# Altium PCB driver_V1.1.PcbDoc (part 1 of 2)
Units mm, origin at the board's own origin, x right, y up, seen from the top; angles counter-clockwise.
Board outline 200 x 65 mm, 2 copper layers (Top Layer, Bottom Layer), stack 1.58 mm thick; 210 components, 21 nets, 550 pads, 102 vias.
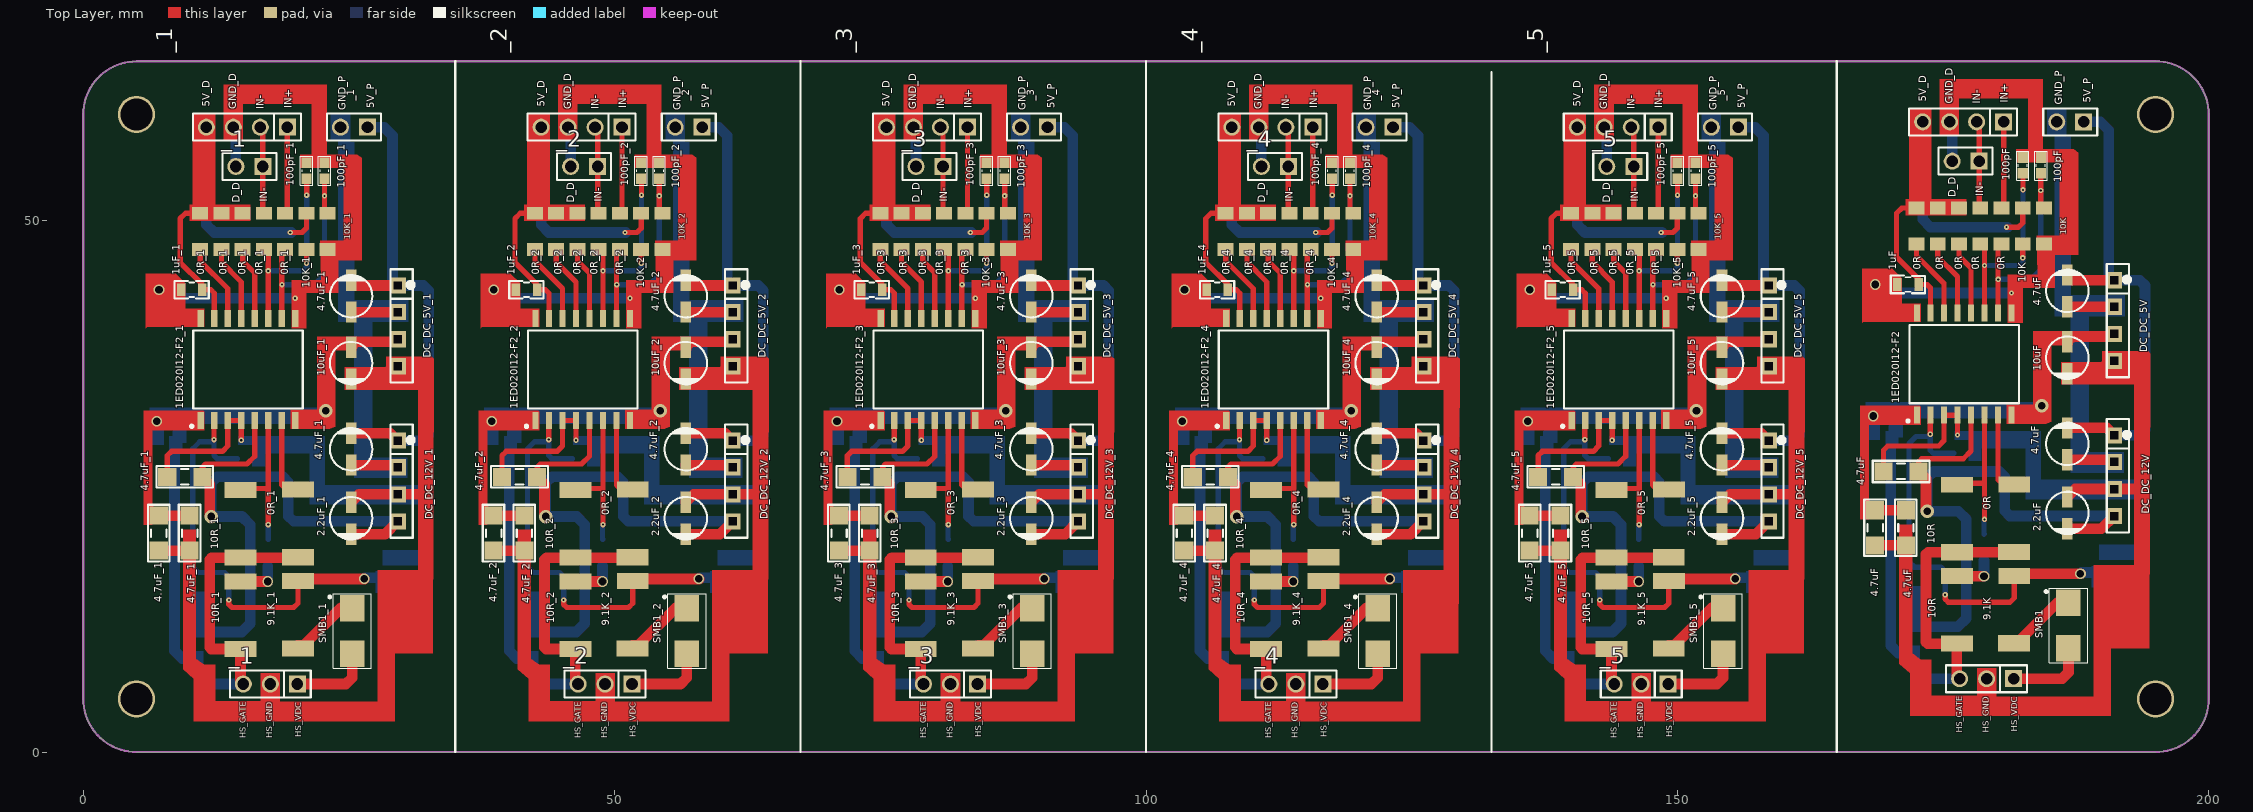
[diagram p0: Top Layer view]
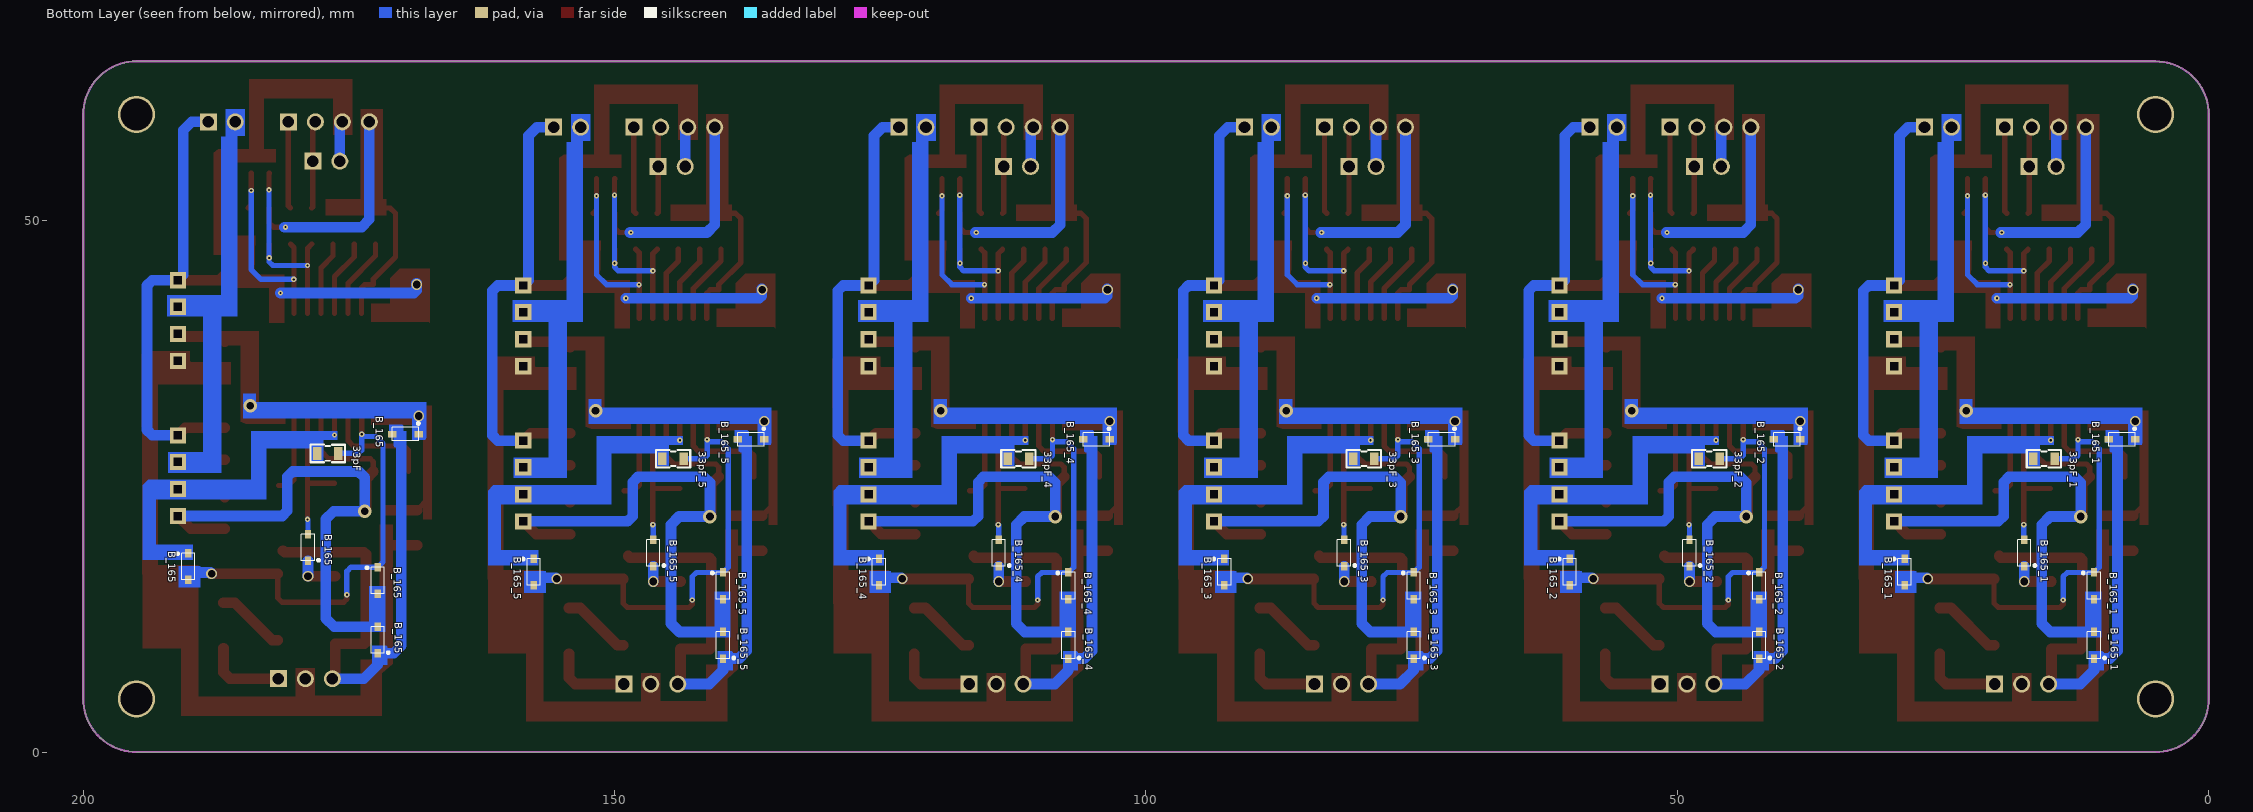
[diagram p1: Bottom Layer view, seen from below]
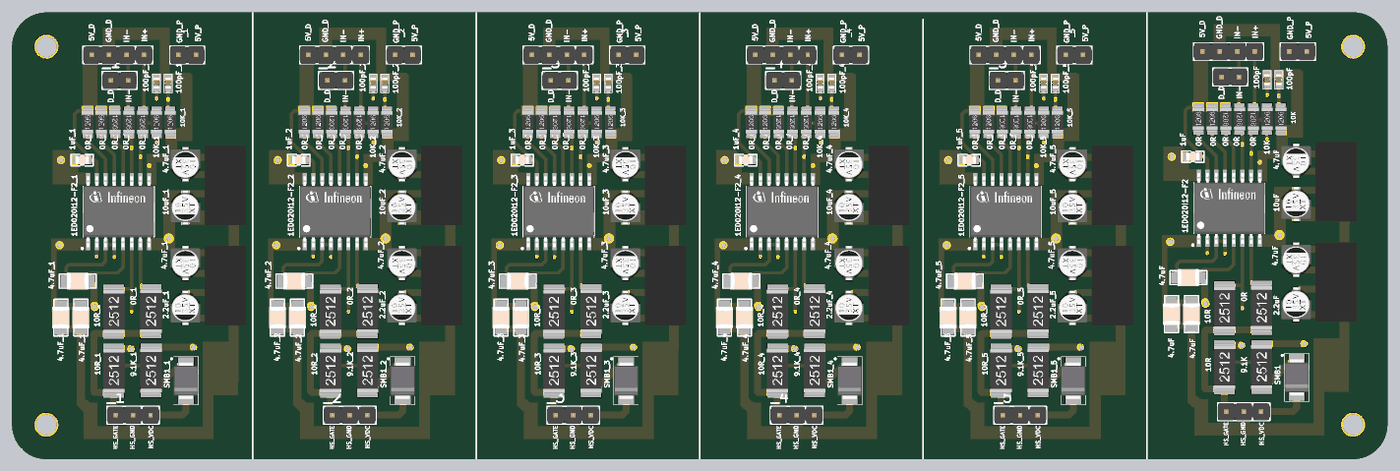
[diagram p3: 3D render of the assembled board from above, using the file's embedded part models]
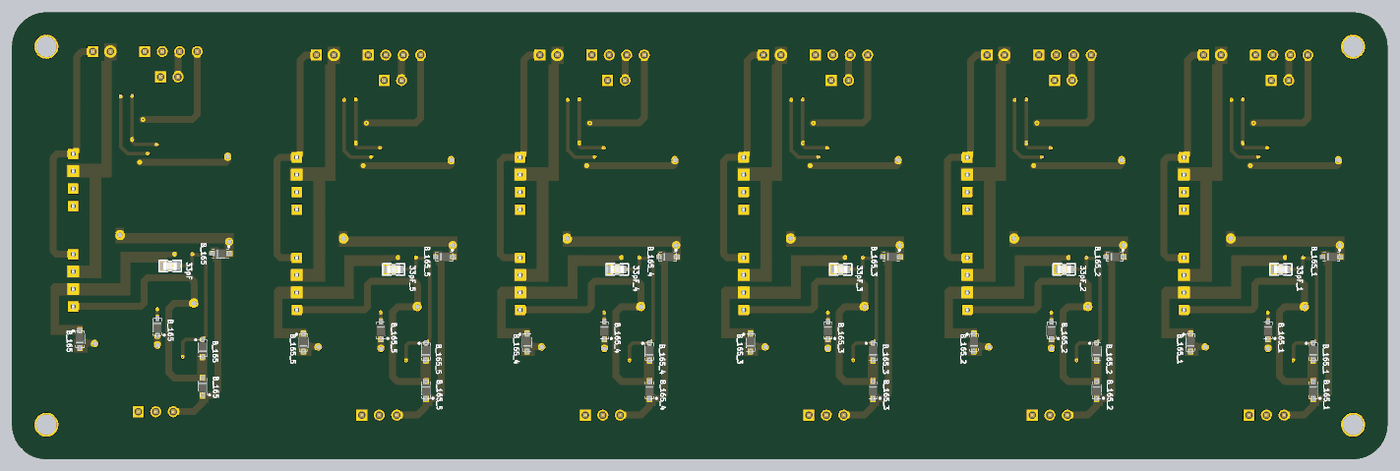
[diagram p4: 3D render of the assembled board from below, using the file's embedded part models]

## Layer stack, top to bottom
Top Solder: solder mask 0.01, Solder Resist, Dk 3.5
Top Layer: signal copper 0.035
Dielectric 1: dielectric 1.51, FR-4, Dk 4.8
Bottom Layer: signal copper 0.035
Bottom Solder: solder mask 0.01, Solder Resist, Dk 3.5

## Board outline
0,5 0,60 cw(c5,59.988) 5.022,64.988 5.022,65 195,65 cw(c195,60) 200,60 200,5 cw(c195,5) 195,0 5,0 cw(c5,5)

## Design rules (kind name [scope] priority, off if disabled: settings)
Clearance [All] p1: gap=0.5
PolygonConnect [All] p1: connectstyle=Relief reliefconductorwidth=0.254 reliefentries=4 polygonreliefangle="90 Angle" airgapwidth=0.254
RoutingVias [All] p1: holewidth=0.711 width=1.27 viastyle="Through Hole" minholewidth=0.711 minwidth=1.27 maxholewidth=0.711 maxwidth=1.27
SolderMaskExpansion [All] p1: expansion=0.102
Width [All] p1: maxlimit=2 minlimit=0.5 preferedwidth=1
30 further rules are at their usual default settings.

## Classes and differential pairs
component class driver_V1.1: 0 0R 13 15 16 17 22 29 30 32 33 B_165 IN+1

## Components (designator, comment, footprint, x,y, rotation, side; value= is the part's Value field where it differs from the comment)
0R "0R" RES1206 178.5,49.5 r270 top
0R "0R" RES_2512 181.9,22 r90 top (schematic designator 17)
0R "0R" RES1206 180.5,49.5 r270 top
0R "0R" RES1206 174.5,49.5 r90 top (schematic designator 11)
0R "0R" RES1206 176.5,49.5 r270 top (schematic designator 13)
0R "0R" RES1206 172.5,49.5 r90 top (schematic designator 12)
0R_1 "0R" RES1206 11,49 r90 top
0R_1 "0R" RES1206 15,49 r270 top
0R_1 "0R" RES1206 13,49 r90 top
0R_1 "0R" RES1206 19,49 r270 top
0R_1 "0R" RES_2512 20.4,21.5 r90 top
0R_1 "0R" RES1206 17,49 r270 top
0R_2 "0R" RES1206 42.5,49 r90 top
0R_2 "0R" RES1206 46.5,49 r270 top
0R_2 "0R" RES1206 44.5,49 r90 top
0R_2 "0R" RES1206 50.5,49 r270 top
0R_2 "0R" RES_2512 51.9,21.5 r90 top
0R_2 "0R" RES1206 48.5,49 r270 top
0R_3 "0R" RES1206 75,49 r90 top
0R_3 "0R" RES1206 79,49 r270 top
0R_3 "0R" RES1206 77,49 r90 top
0R_3 "0R" RES1206 83,49 r270 top
0R_3 "0R" RES_2512 84.4,21.5 r90 top
0R_3 "0R" RES1206 81,49 r270 top
0R_4 "0R" RES1206 107.5,49 r90 top
0R_4 "0R" RES1206 111.5,49 r270 top
0R_4 "0R" RES1206 109.5,49 r90 top
0R_4 "0R" RES1206 115.5,49 r270 top
0R_4 "0R" RES_2512 116.9,21.5 r90 top
0R_4 "0R" RES1206 113.5,49 r270 top
0R_5 "0R" RES1206 140,49 r90 top
0R_5 "0R" RES1206 144,49 r270 top
0R_5 "0R" RES1206 142,49 r90 top
0R_5 "0R" RES1206 148,49 r270 top
0R_5 "0R" RES_2512 149.4,21.5 r90 top
0R_5 "0R" RES1206 146,49 r270 top
1ED020I12-F2 "1ED020I12-F2" SOIC127P1028X264-16N-1 177,36.5 r90 top (schematic designator 14)
1ED020I12-F2_1 "1ED020I12-F2" SOIC127P1028X264-16N-1 15.5,36 r90 top
1ED020I12-F2_2 "1ED020I12-F2" SOIC127P1028X264-16N-1 47,36 r90 top
1ED020I12-F2_3 "1ED020I12-F2" SOIC127P1028X264-16N-1 79.5,36 r90 top
1ED020I12-F2_4 "1ED020I12-F2" SOIC127P1028X264-16N-1 112,36 r90 top
1ED020I12-F2_5 "1ED020I12-F2" SOIC127P1028X264-16N-1 144.5,36 r90 top
1uF "1uF" "Tu 0805_N" 171.7,44 r0 top (schematic designator 8)
1uF_1 "1uF" "Tu 0805_N" 10.2,43.5 r0 top
1uF_2 "1uF" "Tu 0805_N" 41.7,43.5 r0 top
1uF_3 "1uF" "Tu 0805_N" 74.2,43.5 r0 top
1uF_4 "1uF" "Tu 0805_N" 106.7,43.5 r0 top
1uF_5 "1uF" "Tu 0805_N" 139.2,43.5 r0 top
2.2uF "2.2uF_35V" tu_4x5.4mm 186.7,22.5 r90 top (schematic designator 2)
2.2uF_1 "2.2uF_35V" tu_4x5.4mm 25.2,22 r90 top
2.2uF_2 "2.2uF_35V" tu_4x5.4mm 56.7,22 r90 top
2.2uF_3 "2.2uF_35V" tu_4x5.4mm 89.2,22 r90 top
2.2uF_4 "2.2uF_35V" tu_4x5.4mm 121.7,22 r90 top
2.2uF_5 "2.2uF_35V" tu_4x5.4mm 154.2,22 r90 top
4.7uF "4.7uF" "tu 1206_N" 171.5,21.1 r270 top (schematic designator 23)
4.7uF "4.7uF" "tu 1206_N" 168.6,21.1 r270 top (schematic designator 22)
4.7uF "4.7uF" "tu 1206_N" 171.05,26.4 r0 top (schematic designator 9)
4.7uF "4.7uF_35V" tu_4x5.4mm 186.7,29 r270 top (schematic designator 5)
4.7uF "4.7uF_35V" tu_4x5.4mm 186.7,43.4 r270 top (schematic designator 1)
4.7uF_1 "4.7uF_35V" tu_4x5.4mm 25.2,42.9 r270 top
4.7uF_1 "4.7uF_35V" tu_4x5.4mm 25.2,28.5 r270 top
4.7uF_1 "4.7uF" "tu 1206_N" 9.55,25.9 r0 top
4.7uF_1 "4.7uF" "tu 1206_N" 7.1,20.6 r270 top
4.7uF_1 "4.7uF" "tu 1206_N" 10,20.6 r270 top
4.7uF_2 "4.7uF_35V" tu_4x5.4mm 56.7,42.9 r270 top
4.7uF_2 "4.7uF_35V" tu_4x5.4mm 56.7,28.5 r270 top
4.7uF_2 "4.7uF" "tu 1206_N" 41.05,25.9 r0 top
4.7uF_2 "4.7uF" "tu 1206_N" 38.6,20.6 r270 top
4.7uF_2 "4.7uF" "tu 1206_N" 41.5,20.6 r270 top
4.7uF_3 "4.7uF_35V" tu_4x5.4mm 89.2,42.9 r270 top
4.7uF_3 "4.7uF_35V" tu_4x5.4mm 89.2,28.5 r270 top
4.7uF_3 "4.7uF" "tu 1206_N" 73.55,25.9 r0 top
4.7uF_3 "4.7uF" "tu 1206_N" 71.1,20.6 r270 top
4.7uF_3 "4.7uF" "tu 1206_N" 74,20.6 r270 top
4.7uF_4 "4.7uF_35V" tu_4x5.4mm 121.7,42.9 r270 top
4.7uF_4 "4.7uF_35V" tu_4x5.4mm 121.7,28.5 r270 top
4.7uF_4 "4.7uF" "tu 1206_N" 106.05,25.9 r0 top
4.7uF_4 "4.7uF" "tu 1206_N" 103.6,20.6 r270 top
4.7uF_4 "4.7uF" "tu 1206_N" 106.5,20.6 r270 top
4.7uF_5 "4.7uF_35V" tu_4x5.4mm 154.2,42.9 r270 top
4.7uF_5 "4.7uF_35V" tu_4x5.4mm 154.2,28.5 r270 top
4.7uF_5 "4.7uF" "tu 1206_N" 138.55,25.9 r0 top
4.7uF_5 "4.7uF" "tu 1206_N" 136.1,20.6 r270 top
4.7uF_5 "4.7uF" "tu 1206_N" 139,20.6 r270 top
9.1K "9.1K" RES_2512 181.9,13.4 r90 top (schematic designator 15)
9.1K_1 "9.1K" RES_2512 20.4,12.9 r90 top
9.1K_2 "9.1K" RES_2512 51.9,12.9 r90 top
9.1K_3 "9.1K" RES_2512 84.4,12.9 r90 top
9.1K_4 "9.1K" RES_2512 116.9,12.9 r90 top
9.1K_5 "9.1K" RES_2512 149.4,12.9 r90 top
10K "10K" RES1206 184.5,49.5 r90 top (schematic designator 21)
10K "10K" RES1206 182.5,49.5 r90 top
10K_1 "10K" RES1206 21,49 r90 top
10K_1 "10K" RES1206 23,49 r90 top
10K_2 "10K" RES1206 52.5,49 r90 top
10K_2 "10K" RES1206 54.5,49 r90 top
10K_3 "10K" RES1206 85,49 r90 top
10K_3 "10K" RES1206 87,49 r90 top
10K_4 "10K" RES1206 117.5,49 r90 top
10K_4 "10K" RES1206 119.5,49 r90 top
10K_5 "10K" RES1206 150,49 r90 top
10K_5 "10K" RES1206 152,49 r90 top
10R "10R" RES_2512 176.508,21.966 r90 top (schematic designator 20)
10R "10R" RES_2512 176.508,13.366 r90 top (schematic designator 19)
10R_1 "10R" RES_2512 15.008,12.866 r90 top
10R_1 "10R" RES_2512 15.008,21.466 r90 top
10R_2 "10R" RES_2512 46.508,12.866 r90 top
10R_2 "10R" RES_2512 46.508,21.466 r90 top
10R_3 "10R" RES_2512 79.008,12.866 r90 top
10R_3 "10R" RES_2512 79.008,21.466 r90 top
10R_4 "10R" RES_2512 111.508,12.866 r90 top
10R_4 "10R" RES_2512 111.508,21.466 r90 top
10R_5 "10R" RES_2512 144.008,12.866 r90 top
10R_5 "10R" RES_2512 144.008,21.466 r90 top
10uF "10uF_35V" tu_4x5.4mm 186.7,37.1 r90 top (schematic designator 4)
10uF_1 "10uF_35V" tu_4x5.4mm 25.2,36.6 r90 top
10uF_2 "10uF_35V" tu_4x5.4mm 56.7,36.6 r90 top
10uF_3 "10uF_35V" tu_4x5.4mm 89.2,36.6 r90 top
10uF_4 "10uF_35V" tu_4x5.4mm 121.7,36.6 r90 top
10uF_5 "10uF_35V" tu_4x5.4mm 154.2,36.6 r90 top
24 "JP 1x2 2.54" "JP 1x2 DT_n" 178.4,55.6 r180 top
33pF "33pF" "Tu 0805_N" 177,28.103 r180 bottom
33pF_1 "33pF" "Tu 0805_N" 15.5,27.603 r180 bottom
33pF_2 "33pF" "Tu 0805_N" 47,27.603 r180 bottom
33pF_3 "33pF" "Tu 0805_N" 79.5,27.603 r180 bottom
33pF_4 "33pF" "Tu 0805_N" 112,27.603 r180 bottom
33pF_5 "33pF" "Tu 0805_N" 144.5,27.603 r180 bottom
100pF "100pF" "Tu 0603" 184.2,55.2 r270 top
100pF "100pF" "Tu 0603" 182.5,55.2 r270 top
100pF_1 "100pF" "Tu 0603" 21,54.7 r270 top
100pF_1 "100pF" "Tu 0603" 22.7,54.7 r270 top
100pF_2 "100pF" "Tu 0603" 52.5,54.7 r270 top
100pF_2 "100pF" "Tu 0603" 54.2,54.7 r270 top
100pF_3 "100pF" "Tu 0603" 85,54.7 r270 top
100pF_3 "100pF" "Tu 0603" 86.7,54.7 r270 top
100pF_4 "100pF" "Tu 0603" 117.5,54.7 r270 top
100pF_4 "100pF" "Tu 0603" 119.2,54.7 r270 top
100pF_5 "100pF" "Tu 0603" 150,54.7 r270 top
100pF_5 "100pF" "Tu 0603" 151.7,54.7 r270 top
_1 "JP 1x2 2.54" "JP 1x2 DT_n" 16.9,55.1 r180 top
_1 "JP 1x4 2.54" "JP 1X4 DT_N" 19.2,58.8 r180 top
_1 "JP 1x2 2.54" "JP 1x2 DT_n" 26.74,58.8 r180 top
_1 "JP 1x3 2.54" "JP 1x3 DT" 20.14,6.4 r180 top
_2 "JP 1x2 2.54" "JP 1x2 DT_n" 48.4,55.1 r180 top
_2 "JP 1x4 2.54" "JP 1X4 DT_N" 50.7,58.8 r180 top
_2 "JP 1x2 2.54" "JP 1x2 DT_n" 58.24,58.8 r180 top
_2 "JP 1x3 2.54" "JP 1x3 DT" 51.64,6.4 r180 top
_3 "JP 1x2 2.54" "JP 1x2 DT_n" 80.9,55.1 r180 top
_3 "JP 1x4 2.54" "JP 1X4 DT_N" 83.2,58.8 r180 top
_3 "JP 1x2 2.54" "JP 1x2 DT_n" 90.74,58.8 r180 top
_3 "JP 1x3 2.54" "JP 1x3 DT" 84.14,6.4 r180 top
_4 "JP 1x2 2.54" "JP 1x2 DT_n" 113.4,55.1 r180 top
_4 "JP 1x4 2.54" "JP 1X4 DT_N" 115.7,58.8 r180 top
_4 "JP 1x2 2.54" "JP 1x2 DT_n" 123.24,58.8 r180 top
_4 "JP 1x3 2.54" "JP 1x3 DT" 116.64,6.4 r180 top
_5 "JP 1x2 2.54" "JP 1x2 DT_n" 145.9,55.1 r180 top
_5 "JP 1x4 2.54" "JP 1X4 DT_N" 148.2,58.8 r180 top
_5 "JP 1x2 2.54" "JP 1x2 DT_n" 155.74,58.8 r180 top
_5 "JP 1x3 2.54" "JP 1x3 DT" 149.14,6.4 r180 top
B_165 "BAT165" BAT165E6327HTSA1TRND 190.12,17.46 r180 bottom
B_165 "BAT165" BAT165E6327HTSA1TRND 169.67,29.92 r270 bottom
B_165 "BAT165" BAT165E6327HTSA1TRND 178.86,19.25 r0 bottom
B_165 "BAT165" BAT165E6327HTSA1TRND 172.3,10.55 r0 bottom
B_165 "BAT165" BAT165E6327HTSA1TRND 172.3,16.15 r180 bottom
B_165_1 "BAT165" BAT165E6327HTSA1TRND 10.8,15.65 r180 bottom
B_165_1 "BAT165" BAT165E6327HTSA1TRND 10.8,10.05 r0 bottom
B_165_1 "BAT165" BAT165E6327HTSA1TRND 17.36,18.75 r0 bottom
B_165_1 "BAT165" BAT165E6327HTSA1TRND 8.17,29.42 r270 bottom
B_165_1 "BAT165" BAT165E6327HTSA1TRND 28.62,16.96 r180 bottom
B_165_2 "BAT165" BAT165E6327HTSA1TRND 42.3,15.65 r180 bottom
B_165_2 "BAT165" BAT165E6327HTSA1TRND 42.3,10.05 r0 bottom
B_165_2 "BAT165" BAT165E6327HTSA1TRND 48.86,18.75 r0 bottom
B_165_2 "BAT165" BAT165E6327HTSA1TRND 39.67,29.42 r270 bottom
B_165_2 "BAT165" BAT165E6327HTSA1TRND 60.12,16.96 r180 bottom
B_165_3 "BAT165" BAT165E6327HTSA1TRND 74.8,15.65 r180 bottom
B_165_3 "BAT165" BAT165E6327HTSA1TRND 74.8,10.05 r0 bottom
B_165_3 "BAT165" BAT165E6327HTSA1TRND 81.36,18.75 r0 bottom
B_165_3 "BAT165" BAT165E6327HTSA1TRND 72.17,29.42 r270 bottom
B_165_3 "BAT165" BAT165E6327HTSA1TRND 92.62,16.96 r180 bottom
B_165_4 "BAT165" BAT165E6327HTSA1TRND 107.3,15.65 r180 bottom
B_165_4 "BAT165" BAT165E6327HTSA1TRND 107.3,10.05 r0 bottom
B_165_4 "BAT165" BAT165E6327HTSA1TRND 113.86,18.75 r0 bottom
B_165_4 "BAT165" BAT165E6327HTSA1TRND 104.67,29.42 r270 bottom
B_165_4 "BAT165" BAT165E6327HTSA1TRND 125.12,16.96 r180 bottom
B_165_5 "BAT165" BAT165E6327HTSA1TRND 139.8,15.65 r180 bottom
B_165_5 "BAT165" BAT165E6327HTSA1TRND 139.8,10.05 r0 bottom
B_165_5 "BAT165" BAT165E6327HTSA1TRND 146.36,18.75 r0 bottom
B_165_5 "BAT165" BAT165E6327HTSA1TRND 137.17,29.42 r270 bottom
B_165_5 "BAT165" BAT165E6327HTSA1TRND 157.62,16.96 r180 bottom
DC_DC_5V "DC_DC_12V" B0512S/D-1W 191.4,40.55 r90 top
DC_DC_5V_1 "DC_DC_12V" B0512S/D-1W 29.9,40.05 r90 top
DC_DC_5V_2 "DC_DC_12V" B0512S/D-1W 61.4,40.05 r90 top
DC_DC_5V_3 "DC_DC_12V" B0512S/D-1W 93.9,40.05 r90 top
DC_DC_5V_4 "DC_DC_12V" B0512S/D-1W 126.4,40.05 r90 top
DC_DC_5V_5 "DC_DC_12V" B0512S/D-1W 158.9,40.05 r90 top
DC_DC_12V "DC_DC_12V" B0512S/D-1W 191.4,25.95 r90 top
DC_DC_12V_1 "DC_DC_12V" B0512S/D-1W 29.9,25.45 r90 top
DC_DC_12V_2 "DC_DC_12V" B0512S/D-1W 61.4,25.45 r90 top
DC_DC_12V_3 "DC_DC_12V" B0512S/D-1W 93.9,25.45 r90 top
DC_DC_12V_4 "DC_DC_12V" B0512S/D-1W 126.4,25.45 r90 top
DC_DC_12V_5 "DC_DC_12V" B0512S/D-1W 158.9,25.45 r90 top
IN+1 "JP 1x4 2.54" "JP 1X4 DT_N" 180.7,59.3 r180 top
JP1 "JP 1x2 2.54" "JP 1x2 DT_n" 188.24,59.3 r180 top
JP2 "JP 1x3 2.54" "JP 1x3 DT" 181.64,6.9 r180 top
SMB1 "S3N" SMB 186.8,11.9 r270 top
SMB1_1 "S3N" SMB 25.3,11.4 r270 top
SMB1_2 "S3N" SMB 56.8,11.4 r270 top
SMB1_3 "S3N" SMB 89.3,11.4 r270 top
SMB1_4 "S3N" SMB 121.8,11.4 r270 top
SMB1_5 "S3N" SMB 154.3,11.4 r270 top

## Footprints (in the part's own frame and the unit in brackets; to place one, negate y for a bottom-side part, rotate by r counter-clockwise, add the part's x,y. Pads: shape width x height; smd on the part's side, far side on the other; paste and mask are expansions set on the pad)
B0512S/D-1W [mm] "B0512S/D-1W"
  rect 1.52x1.52 hole 0.75 square: 1(3.85,0.3) 2(1.35,0.3) 3(-1.2,0.3) 4(-3.74,0.3)
  silkscreen extent -5.28,-1.12 5.38,1, body extent -6,-4.1 5.6,1.91, height 18
BAT165E6327HTSA1TRND [mm] "BAT165E6327HTSA1TRND"
  rect 0.6x0.8 smd: 1(0,1.25) 2(0,-1.25)
  silkscreen extent -1.1,-1.25 0.63,1.3, body extent -0.71,-1.52 0.71,1.52, height 1.14
"JP 1x2 DT_n" [mm] "2 pins, 1 row, straight, gold plating"
  rect 1.6x1.6 hole 1.1: 1(0,0)
  round 1.6 hole 1.1: 2(2.54,0)
  silkscreen extent -1.27,-1.27 3.81,1.27, body extent -1.27,-1.27 3.81,1.27, height 8.54
"JP 1x3 DT" [mm]
  rect 1.6x1.6 hole 1.1: 1(0,0)
  round 1.6 hole 1.1: 2(2.54,0) 3(5.08,0)
  silkscreen extent -1.27,-1.27 6.35,1.27, body extent -1.27,-1.27 6.35,1.27, height 8.54
"JP 1X4 DT_N" [mm] "4 pins, 1 row, straight, gold plating"
  rect 1.6x1.6 hole 1.1: 1(0,0)
  round 1.6 hole 1.1: 2(2.54,0) 3(5.08,0) 4(7.62,0)
  silkscreen extent -1.27,-1.27 8.89,1.27, body extent -1.27,-1.27 8.89,1.27, height 8.54
RES1206 [mm]
  rect 1.2x1.5 smd: 1(-1.7,0) 2(1.7,0)
  body extent -1.9,-0.8 1.9,0.8, height 0.6
RES_2512 [mm]
  rect 1.5x3 smd: 1(3.185,0.2)
  rect 1.524x3 smd: 2(-3.166,0.208)
  body extent -3.4,-1.35 3.4,1.75, height 0.6
SMB [mm] "DO-214"
  rect 2.5x2.3 smd: 1(-2.15,0) 2(2.15,0)
  silkscreen extent -3.5,-2.2 3.5,1.8, body extent -2.7,-1.8 2.7,1.8
SOIC127P1028X264-16N-1 [mm] "SOIC,1.27mm,pitch;16 pin,7.52mm W X 10.34mm L X 2.64mm H body"
  rect 1.6x0.6 smd paste+0 mask+0: 1(-4.8,4.445) 2(-4.8,3.175) 3(-4.8,1.905) 4(-4.8,0.635) 5(-4.8,-0.635) 6(-4.8,-1.905) 7(-4.8,-3.175) 8(-4.8,-4.445) 9(4.8,-4.445) 10(4.8,-3.175) 11(4.8,-1.905) 12(4.8,-0.635) 13(4.8,0.635) 14(4.8,1.905) 15(4.8,3.175) 16(4.8,4.445)
  silkscreen extent -5.47,-5.15 3.68,5.42, body extent -5.16,-5.17 5.16,5.17, height 2.65
"Tu 0603" [mm] "Chip Capacitor, 2-Leads, Body 1,60x0,80mm, IPC Medium Density"
  rect 1x0.95 smd mask+0.076: 1(-0.75,0) 2(0.75,0)
  silkscreen extent -1.35,-0.58 1.37,0.58, body extent -0.8,-0.4 0.8,0.4, height 0.9
"Tu 0805_N" [mm] "Compoment SMD 80x50mil"
  rect 0.8x1.2 smd: 1(-1,-0.003) 2(1,0)
  silkscreen extent -1.62,-0.83 1.61,0.83, body extent -1,-0.62 1,0.63, height 1.26
"tu 1206_N" [mm]
  rect 1.7x1.7 smd: 1(-1.65,0) 2(1.65,0)
  silkscreen extent -2.67,-1.02 2.67,1.02, body extent -1.6,-1.25 1.6,1.25, height 2.01
tu_4x5.4mm [mm]
  rect 2x1 smd: 1(-1.5,0) 2(1.5,0)
  silkscreen extent -2,-2 2,2, body extent -2.45,-2.15 2.45,2.15, height 5.4

## Part data
0R 0R 0R 0R 0R 0R 0R_1 0R_1 0R_1 0R_1 0R_1 0R_1 0R_2 0R_2 0R_2 0R_2 0R_2 0R_2 0R_3 0R_3 0R_3 0R_3 0R_3 0R_3 0R_4 0R_4 0R_4 0R_4 0R_4 0R_4 0R_5 0R_5 0R_5 0R_5 0R_5 0R_5 9.1K 9.1K_1 9.1K_2 9.1K_3 9.1K_4 9.1K_5 10K 10K 10K_1 10K_1 10K_2 10K_2 10K_3 10K_3 10K_4 10K_4 10K_5 10K_5 10R 10R 10R_1 10R_1 10R_2 10R_2 10R_3 10R_3 10R_4 10R_4 10R_5 10R_5: library part 311-0.0GRTR-ND
1ED020I12-F2 1ED020I12-F2_1 1ED020I12-F2_2 1ED020I12-F2_3 1ED020I12-F2_4 1ED020I12-F2_5: "Single IGBT Driver IC"
1uF 1uF_1 1uF_2 1uF_3 1uF_4 1uF_5 33pF 33pF_1 33pF_2 33pF_3 33pF_4 33pF_5: library part cap_0805
2.2uF 2.2uF_1 2.2uF_2 2.2uF_3 2.2uF_4 2.2uF_5 4.7uF 4.7uF 4.7uF_1 4.7uF_1 4.7uF_2 4.7uF_2 4.7uF_3 4.7uF_3 4.7uF_4 4.7uF_4 4.7uF_5 4.7uF_5 10uF 10uF_1 10uF_2 10uF_3 10uF_4 10uF_5: library part capacitor_electric, "capacitor_electric"
4.7uF 4.7uF 4.7uF 4.7uF_1 4.7uF_1 4.7uF_1 4.7uF_2 4.7uF_2 4.7uF_2 4.7uF_3 4.7uF_3 4.7uF_3 4.7uF_4 4.7uF_4 4.7uF_4 4.7uF_5 4.7uF_5 4.7uF_5: library part cap_1210
24 _1 _1 _2 _2 _3 _3 _4 _4 _5 _5 JP1: library part "JP 1x2 2.54 Duc Thang", "C?m"
100pF 100pF 100pF_1 100pF_1 100pF_2 100pF_2 100pF_3 100pF_3 100pF_4 100pF_4 100pF_5 100pF_5: library part cap_0603
_1 _2 _3 _4 _5 IN+1: library part "JP 1x4 2.54 Duc Thang", "C?m"
_1 _2 _3 _4 _5 JP2: library part "JP 1x3 2.54 Duc Cong", "C?m"
DC_DC_5V DC_DC_5V_1 DC_DC_5V_2 DC_DC_5V_3 DC_DC_5V_4 DC_DC_5V_5 DC_DC_12V DC_DC_12V_1 DC_DC_12V_2 DC_DC_12V_3 DC_DC_12V_4 DC_DC_12V_5: library part DC_DC_12v
SMB1 SMB1_1 SMB1_2 SMB1_3 SMB1_4 SMB1_5: library part S3A-S3N

## Free pads (board coordinates)
  round 3.5 hole 3: 0(5,5) 0(5,60) 0(195,5) 0(195,60)

## Via types
v1: diameter 0.5, hole 0.2, Top Layer to Bottom Layer, 66 vias
v2: diameter 1, hole 0.72, Top Layer to Bottom Layer, 18 vias
v3: diameter 1.27, hole 0.72, Top Layer to Bottom Layer, 12 vias
v4: diameter 1, hole 0.7, Top Layer to Bottom Layer, 6 vias

## Nets (pads, with @x,y where several pads share a name; then routed paths per layer and width w, separated by ;. In a path a pad name is that pad's centre, name@x,y a point inside that pad or via, vN(x,y) a via of type N, cw(c..) or ccw(c..) an arc to the next point about the centre after c; other vN are vias at no path point)
5V: 0R.1@176.5,51.2 0R.2@172.5,51.2 0R.2@174.5,51.2 1ED020I12-F2.15 1uF.2 10K.2@182.5,51.2 IN+1.4 | length 46.2
  Top Layer w0.5: IN+1.4@173.08,59.3 172.5,58.72 0R.2@172.5,51.2 ; 1ED020I12-F2.15@173.825,41.3 173.825,43.675 173.5,44 1uF.2@172.7,44 172.7,44.496 170.62,46.577 170.62,50.7 171.12,51.2 0R.2@172.5,51.2 ; 0R.1@176.5,51.2 0R.2@174.5,51.2 0R.2@172.5,51.2 ; v1(180.97,49.39) 182.09,49.39 182.5,49.8 10K.2@182.5,51.2
  Bottom Layer w1: IN+1.4@173.08,59.3 173.08,50.12 173.81,49.39 v1(180.97,49.39) v1@181.06,49.39
12V: 1ED020I12-F2.5 2.2uF.1 4.7uF.2@172.7,26.4 B_165.2@172.3,11.8 B_165.2@172.3,14.9 DC_DC_12V.4 | length 61.8
  Top Layer w0.5: 4.7uF.2@172.7,26.4 172.7,27.3 173,27.6 176.9,27.6 177.635,28.335 1ED020I12-F2.5@177.635,31.7 ; v3@173.4,22.78 v3@173.55,22.63
  Top Layer w1: 4.7uF.2@172.7,26.4 173.4,25.7 v3@173.4,22.78 ; 2.2uF.1@186.7,21 189.89,21 DC_DC_12V.4@191.1,22.21
  Bottom Layer w1: B_165.2@172.3,11.8 176.4,11.8 177.2,12.6 177.2,21.9 176.44,22.66 v3(173.53,22.66) 173.53,25.83 174.1,26.4 180.3,26.4 180.8,25.9 180.8,22.7 181.29,22.21 DC_DC_12V.4@191.1,22.21
-5V: 1ED020I12-F2.1 1ED020I12-F2.8 4.7uF.1@168.6,22.75 4.7uF.1@171.5,22.75 10uF.2 B_165.1@168.42,29.92 DC_DC_5V.3 | length 51.1
  Top Layer w0.5: 4.7uF.1@168.6,22.75 167.5,23.85 167.5,31.1 168.02,31.62 v2(168.42,31.62) 172.475,31.62 1ED020I12-F2.1@172.555,31.7 ; 1ED020I12-F2.8@181.445,31.7 183.5,31.7 184.4,32.6 184.4,38.2 184.8,38.6 10uF.2@186.7,38.6 ; DC_DC_5V.3@190.85,39.1 DC_DC_5V.3@191.1,39.35
  Top Layer w1: 4.7uF.1@168.6,22.75 4.7uF.1@171.5,22.75 ; 10uF.2@186.7,38.6 187.2,39.1 DC_DC_5V.3@190.85,39.1
  Bottom Layer w1: B_165.1@168.42,29.92 v2(168.42,31.62) 168.9,32.1 183.8,32.1 v3(184.3,32.6)
GND_D: 1ED020I12-F2.9 1ED020I12-F2.16 1uF.1 10K.1@184.5,47.8 24.2 100pF.1 IN+1.3 | length 65.4
  Top Layer w0.5: v2(168.623,43.997) 1uF.1@170.7,43.997 170.7,41.72 171.12,41.3 1ED020I12-F2.16@172.555,41.3 ; IN+1.3@175.86,59.06 IN+1.3@175.62,59.3 175.62,61.76 176.35,62.49 182.8,62.49 183.72,61.57 183.72,56.43 100pF.1@184.2,55.95 ; 1ED020I12-F2.9@181.445,41.3 181.445,43.745 181.8,44.1 184.3,44.1 184.5,44.3 10K.1@184.5,47.8 184.8,48.1 186.8,48.1 187.4,48.7 187.4,55.36 186.81,55.95 100pF.1@184.2,55.95 ; 100pF.1@182.5,55.95 100pF.1@184.2,55.95
  Bottom Layer w1: v2@168.64,44.1 168.64,43.45 168.89,43.2 v1(181.44,43.2) ; IN+1.3@175.62,59.3 175.86,59.06 24.2@175.86,55.6
GND_P: 4.7uF.2@186.7,27.5 4.7uF.2@186.7,41.9 DC_DC_5V.2 DC_DC_12V.2 JP1.2 | length 48.5
  Top Layer w0.5: DC_DC_12V.2@190.9,27.5 DC_DC_12V.2@191.1,27.3
  Top Layer w1: 4.7uF.2@186.7,27.5 DC_DC_12V.2@190.9,27.5 ; 4.7uF.2@186.7,41.9 DC_DC_5V.2@191.1,41.9
  Bottom Layer w0.5: JP1.2@185.7,59.3 186,59 186,42.5 186.6,41.9 187.9,41.9 ; DC_DC_12V.2@191.1,27.3 188.7,27.3 187.9,28.1 187.9,41.9 ; DC_DC_5V.2@191.1,41.9 187.9,41.9
HS_GATE: 0R.2@181.692,18.834 10R.2 B_165.1@172.3,9.3 B_165.2@170.92,29.92 JP2.3 | length 50.4
  Top Layer w1: JP2.3@176.56,6.9 176.3,7.16 10R.2@176.3,10.2 173.55,10.2 173.4,10.35 173.4,18.6 173.6,18.8 10R.2@176.3,18.8 181.058,18.8 0R.2@181.207,18.949
  Bottom Layer w1: 170.08,29.48 170.08,10.02 170.8,9.3 B_165.1@172.3,9.3 172.3,8.2 173.6,6.9 JP2.3@176.56,6.9
HS_GND: 1ED020I12-F2.3 1ED020I12-F2.4 2.2uF.2 4.7uF.1@169.4,26.4 4.7uF.2@168.6,19.45 4.7uF.2@171.5,19.45 10uF.1 33pF.1 B_165.1@190.12,18.71 DC_DC_5V.4 DC_DC_12V.3 JP2.2 | length 134.1
  Top Layer w0.5: 4.7uF.1@169.4,26.4 169.4,28.4 169.8,28.8 174.595,28.8 175.095,29.3 1ED020I12-F2.3@175.095,31.7 1ED020I12-F2.4@176.365,31.7 v1(176.365,29.835)
  Top Layer w1: 4.7uF.2@168.6,19.45 4.7uF.2@171.5,19.45 ; 4.7uF.2@171.5,19.55 4.7uF.2@171.5,19.45 ; 179.1,5.06 JP2.2@179.1,6.9 ; 2.2uF.2@186.7,24 187.45,24.75 DC_DC_12V.3@191.1,24.75 193.8,24.75 ; 10uF.1@186.7,35.6 187,35.9 190.19,35.9 DC_DC_5V.4@191.1,36.81 192.99,36.81 193.8,36 193.8,24.75 ; 4.7uF.2@171.5,19.45 171.5,8.5 171.9,8.1 172.6,8.1 172.9,7.8 172.9,5.6 173.77,4.73 189.57,4.73 189.8,4.96 189.8,10.2 190.4,10.8 193.1,10.8 193.8,11.5 193.8,24.75
  Bottom Layer w0.5: v1(176.365,29.835) 182.965,29.835 183.4,29.4 183.4,25.3 183.95,24.75 DC_DC_12V.3@191.1,24.75 192.92,24.75 193.73,23.94 193.73,19.62 192.82,18.71 B_165.1@190.12,18.71 ; v1@176.4,29.8 178,29.8 33pF.1@178,28.1
HS_HV_VDC: JP2.1 SMB1.2 | length 7.7
  Top Layer w1: JP2.1@181.64,6.9 186.2,6.9 186.8,7.5 SMB1.2@186.8,9.75
Net13_1: 0R.2@178.5,47.8 1ED020I12-F2.11 10K.1@182.5,47.8 100pF.2@182.5,54.45 | length 20.1
  Top Layer w0.5: 0R.2@178.5,47.8 178.905,47.395 v1(178.905,45.78) 1ED020I12-F2.11@178.905,41.3 ; v1(182.5,46.5) 10K.1@182.5,47.8 ; 100pF.2@182.5,54.45 182.52,54.43 v1(182.52,52.9)
  Bottom Layer w0.5: v1(178.905,45.78) 182.16,45.78 182.52,46.14 v1(182.52,52.9)
Net15_1: 0R.1@172.5,47.8 1ED020I12-F2.14 | length 7.6
  Top Layer w0.5: 0R.1@172.5,47.8 172.5,46.7 175.095,44.105 1ED020I12-F2.14@175.095,41.3
Net16_2: 0R.2@176.5,47.8 1ED020I12-F2.12 | length 7
  Top Layer w0.5: 0R.2@176.5,47.8 176.5,46.7 177.635,45.565 1ED020I12-F2.12@177.635,41.3
Net17_1: 0R.1@174.5,47.8 1ED020I12-F2.13 | length 7.3
  Top Layer w0.5: 0R.1@174.5,47.8 174.5,46.6 176.365,44.735 1ED020I12-F2.13@176.365,41.3
Net18_2: 1ED020I12-F2.2 9.1K.1 33pF.2 B_165.1@172.3,17.4 B_165.2@190.12,16.21 | length 43.1
  Top Layer w0.5: v1(173.8,29.9) 173.8,31.675 1ED020I12-F2.2@173.825,31.7 ; v1(175.2,14.8) 175.2,14.4 175.5,14.1 181.3,14.1 181.7,14.5 9.1K.1@181.7,16.585
  Top Layer w1: 9.1K.1@181.7,16.785 v4@187.935,16.785
  Bottom Layer w0.5: v1(175.2,14.8) 175.2,17 174.8,17.4 B_165.1@172.3,17.4 171.8,17.9 171.8,29.039 172.461,29.7 173.6,29.7 v1(173.8,29.9) 173.8,28.4 174.097,28.103 33pF.2@176,28.103
  Bottom Layer w1: v4(187.93,16.79) 188.03,16.89 189.44,16.89 B_165.2@190.12,16.21
Net18_6: 1ED020I12-F2.6 10R.1@176.308,25.151 B_165.2@178.86,20.5 | length 13.8
  Top Layer w0.5: 10R.1@176.385,25.3 178.905,25.3 ; v1@178.9,21.89 v1(178.905,21.895) 178.905,25.3 ; 1ED020I12-F2.6@178.905,31.7 178.905,25.3
  Bottom Layer w0.5: B_165.2@178.88,20.52 B_165.2@178.86,20.5 178.86,21.85 v1(178.905,21.895)
Net18_7: 0R.1@181.7,25.185 1ED020I12-F2.7 | length 7.7
  Top Layer w0.5: 1ED020I12-F2.7@180.175,31.7 180.175,25.625 180.715,25.085 0R.1@181.6,25.085
Net18_10: 0R.2@180.5,47.8 1ED020I12-F2.10 10K.2@184.5,51.2 100pF.2@184.2,54.45 | length 21.8
  Top Layer w0.5: 1ED020I12-F2.10@180.175,41.3 180.175,47.475 0R.2@180.5,47.8 ; 100pF.2@184.2,54.45 v1(184.2,52.84) 184.2,51.5 10K.2@184.5,51.2
  Bottom Layer w0.5: v1(180.2,44.48) 183.27,44.48 184.2,45.41 v1(184.2,52.84)
Net19_2: 9.1K.2 SMB1.1 | length 6.6
  Top Layer w1: 9.1K.2@181.692,10.534 182.234,10.534 185.75,14.05 SMB1.1@186.8,14.05
Net20_1: 0R.1@180.5,51.2 IN+1.1 | length 8.2
  Top Layer w0.5: 0R.1@180.5,51.2 180.7,51.4 IN+1.1@180.7,59.3
Net22_1: 0R.1@178.5,51.2 24.1 IN+1.2 | length 8.6
  Top Layer w0.5: IN+1.2@178.16,59.3 178.4,59.06 24.1@178.4,55.6 178.4,51.3 0R.1@178.5,51.2
  Bottom Layer w0.5: 24.1@178.16,55.84 24.1@178.4,55.6
Net23_1: 10R.1@176.308,16.551 B_165.1@178.86,18 | length 4
  Top Layer w0.5: v2@178.819,16.551 v2@178.83,16.54
  Top Layer w1: 10R.1@176.308,16.551 v2@178.819,16.551
  Bottom Layer w1: v2(178.86,16.55) B_165.1@178.86,18
VCC_5V: 4.7uF.1@186.7,30.5 4.7uF.1@186.7,44.9 DC_DC_5V.1 DC_DC_12V.1 JP1.1 | length 46.1
  Top Layer w1: 4.7uF.1@186.7,30.5 190.4,30.5 DC_DC_12V.1@191.1,29.8 ; 4.7uF.1@186.7,44.9 187.2,44.4 DC_DC_5V.1@191.1,44.4
  Bottom Layer w1: JP1.1@188.24,59.3 189.8,59.3 190.6,58.5 190.6,44.9 DC_DC_5V.1@191.1,44.4 193.5,44.4 194,43.9 194,30.3 193.5,29.8 DC_DC_12V.1@191.1,29.8
pads on no net: 0R_1.1 0R_1.2 0R_2.1 0R_2.2 0R_3.1 0R_3.2 0R_4.1 0R_4.2 0R_5.1 0R_5.2 1ED020I12-F2_1.1 1ED020I12-F2_1.2 1ED020I12-F2_1.3 1ED020I12-F2_1.4 1ED020I12-F2_1.5 1ED020I12-F2_1.6 1ED020I12-F2_1.7 1ED020I12-F2_1.8 1ED020I12-F2_1.9 1ED020I12-F2_1.10 1ED020I12-F2_1.11 1ED020I12-F2_1.12 1ED020I12-F2_1.13 1ED020I12-F2_1.14 1ED020I12-F2_1.15 1ED020I12-F2_1.16 1ED020I12-F2_2.1 1ED020I12-F2_2.2 1ED020I12-F2_2.3 1ED020I12-F2_2.4 1ED020I12-F2_2.5 1ED020I12-F2_2.6 1ED020I12-F2_2.7 1ED020I12-F2_2.8 1ED020I12-F2_2.9 1ED020I12-F2_2.10 1ED020I12-F2_2.11 1ED020I12-F2_2.12 1ED020I12-F2_2.13 1ED020I12-F2_2.14 1ED020I12-F2_2.15 1ED020I12-F2_2.16 1ED020I12-F2_3.1 1ED020I12-F2_3.2 1ED020I12-F2_3.3 1ED020I12-F2_3.4 1ED020I12-F2_3.5 1ED020I12-F2_3.6 1ED020I12-F2_3.7 1ED020I12-F2_3.8 1ED020I12-F2_3.9 1ED020I12-F2_3.10 1ED020I12-F2_3.11 1ED020I12-F2_3.12 1ED020I12-F2_3.13 1ED020I12-F2_3.14 1ED020I12-F2_3.15 1ED020I12-F2_3.16 1ED020I12-F2_4.1 1ED020I12-F2_4.2 1ED020I12-F2_4.3 1ED020I12-F2_4.4 1ED020I12-F2_4.5 1ED020I12-F2_4.6 1ED020I12-F2_4.7 1ED020I12-F2_4.8 1ED020I12-F2_4.9 1ED020I12-F2_4.10 1ED020I12-F2_4.11 1ED020I12-F2_4.12 1ED020I12-F2_4.13 1ED020I12-F2_4.14 1ED020I12-F2_4.15 1ED020I12-F2_4.16 1ED020I12-F2_5.1 1ED020I12-F2_5.2 1ED020I12-F2_5.3 1ED020I12-F2_5.4 1ED020I12-F2_5.5 1ED020I12-F2_5.6 1ED020I12-F2_5.7 1ED020I12-F2_5.8 1ED020I12-F2_5.9 1ED020I12-F2_5.10 1ED020I12-F2_5.11 1ED020I12-F2_5.12 1ED020I12-F2_5.13 1ED020I12-F2_5.14 1ED020I12-F2_5.15 1ED020I12-F2_5.16 1uF_1.1 1uF_1.2 1uF_2.1 1uF_2.2 1uF_3.1 1uF_3.2 1uF_4.1 1uF_4.2 1uF_5.1 1uF_5.2 2.2uF_1.1 2.2uF_1.2 2.2uF_2.1 2.2uF_2.2 2.2uF_3.1 2.2uF_3.2 2.2uF_4.1 2.2uF_4.2 2.2uF_5.1 2.2uF_5.2 4.7uF_1.1 4.7uF_1.2 4.7uF_2.1 4.7uF_2.2 4.7uF_3.1 4.7uF_3.2 4.7uF_4.1 4.7uF_4.2 4.7uF_5.1 4.7uF_5.2 9.1K_1.1 9.1K_1.2 9.1K_2.1 9.1K_2.2 9.1K_3.1 9.1K_3.2 9.1K_4.1 9.1K_4.2 9.1K_5.1 9.1K_5.2 10K_1.1 10K_1.2 10K_2.1 10K_2.2 10K_3.1 10K_3.2 10K_4.1 10K_4.2 10K_5.1 10K_5.2 10R_1.1 10R_1.2 10R_2.1 10R_2.2 10R_3.1 10R_3.2 10R_4.1 10R_4.2 10R_5.1 10R_5.2 10uF_1.1 10uF_1.2 10uF_2.1 10uF_2.2 10uF_3.1 10uF_3.2 10uF_4.1 10uF_4.2 10uF_5.1 10uF_5.2 33pF_1.1 33pF_1.2 33pF_2.1 33pF_2.2 33pF_3.1 33pF_3.2 33pF_4.1 33pF_4.2 33pF_5.1 33pF_5.2 100pF_1.1 100pF_1.2 100pF_2.1 100pF_2.2 100pF_3.1 100pF_3.2 100pF_4.1 100pF_4.2 100pF_5.1 100pF_5.2 _1.1 _1.2 _1.3 _1.4 _2.1 _2.2 _2.3 _2.4 _3.1 _3.2 _3.3 _3.4 _4.1 _4.2 _4.3 _4.4 _5.1 _5.2 _5.3 _5.4 B_165_1.1 B_165_1.2 B_165_2.1 B_165_2.2 B_165_3.1 B_165_3.2 B_165_4.1 B_165_4.2 B_165_5.1 B_165_5.2 DC_DC_5V_1.1 DC_DC_5V_1.2 DC_DC_5V_1.3 DC_DC_5V_1.4 DC_DC_5V_2.1 DC_DC_5V_2.2 DC_DC_5V_2.3 DC_DC_5V_2.4 DC_DC_5V_3.1 DC_DC_5V_3.2 DC_DC_5V_3.3 DC_DC_5V_3.4 DC_DC_5V_4.1 DC_DC_5V_4.2 DC_DC_5V_4.3 DC_DC_5V_4.4 DC_DC_5V_5.1 DC_DC_5V_5.2 DC_DC_5V_5.3 DC_DC_5V_5.4 DC_DC_12V_1.1 DC_DC_12V_1.2 DC_DC_12V_1.3 DC_DC_12V_1.4 DC_DC_12V_2.1 DC_DC_12V_2.2 DC_DC_12V_2.3 DC_DC_12V_2.4 DC_DC_12V_3.1 DC_DC_12V_3.2 DC_DC_12V_3.3 DC_DC_12V_3.4 DC_DC_12V_4.1 DC_DC_12V_4.2 DC_DC_12V_4.3 DC_DC_12V_4.4 DC_DC_12V_5.1 DC_DC_12V_5.2 DC_DC_12V_5.3 DC_DC_12V_5.4 SMB1_1.1 SMB1_1.2 SMB1_2.1 SMB1_2.2 SMB1_3.1 SMB1_3.2 SMB1_4.1 SMB1_4.2 SMB1_5.1 SMB1_5.2